# Altium PCB PCB1.PcbDoc
Units mm, origin at the board's own origin, x right, y up, seen from the top; angles counter-clockwise.
Board outline 219.44 x 29.08 mm, 7 copper layers (Top Layer, Signal Layer 2, Signal Layer 1, Signal Layer 3, Signal Layer 4, Internal Plane 1, Bottom Layer), stack 1.394 mm thick; 46 components, 7 nets, 276 pads, 11 vias.
Unrouted connection lines stored in the file: 6.
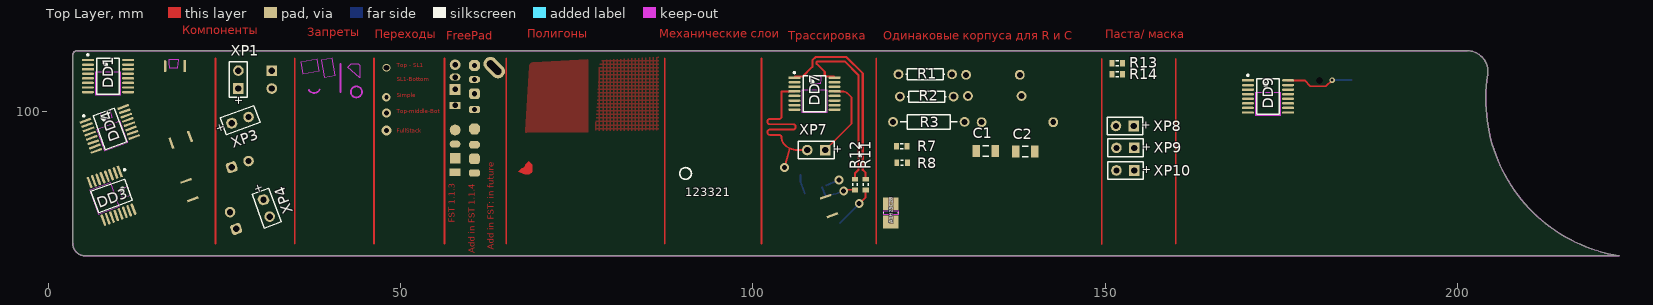
[diagram p0: Top Layer view]
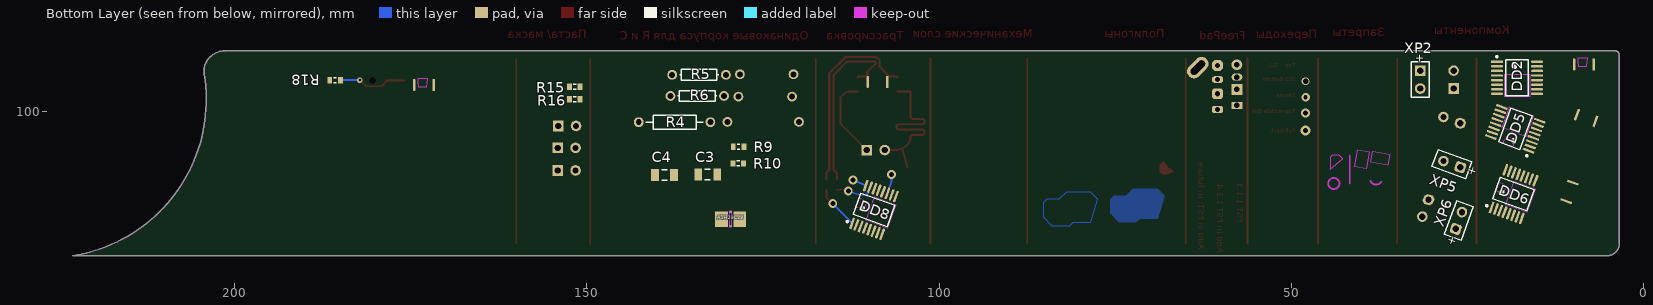
[diagram p1: Bottom Layer view, seen from below]
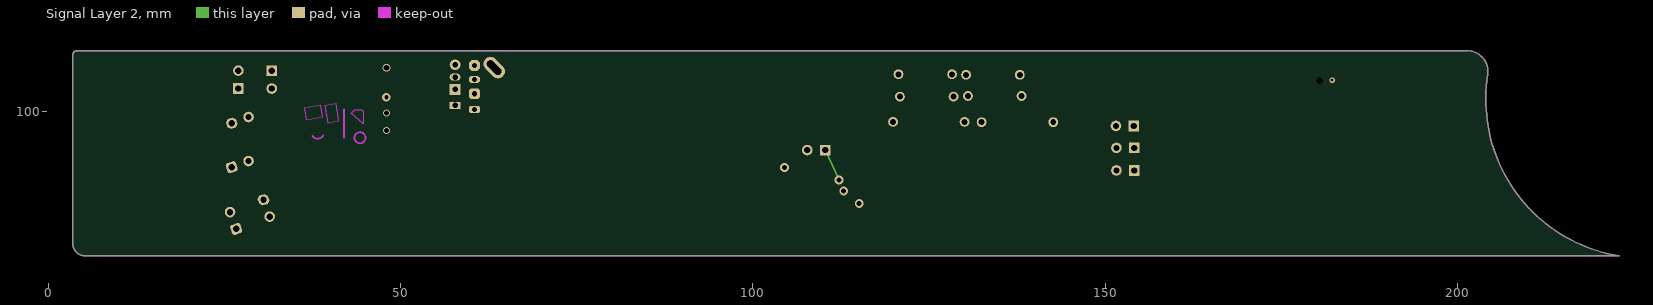
[diagram p2: Signal Layer 2]
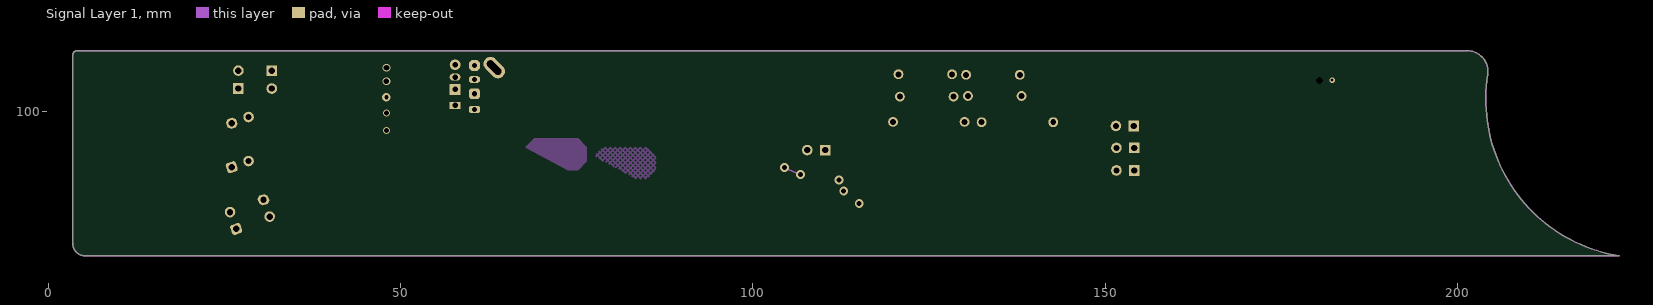
[diagram p3: Signal Layer 1]
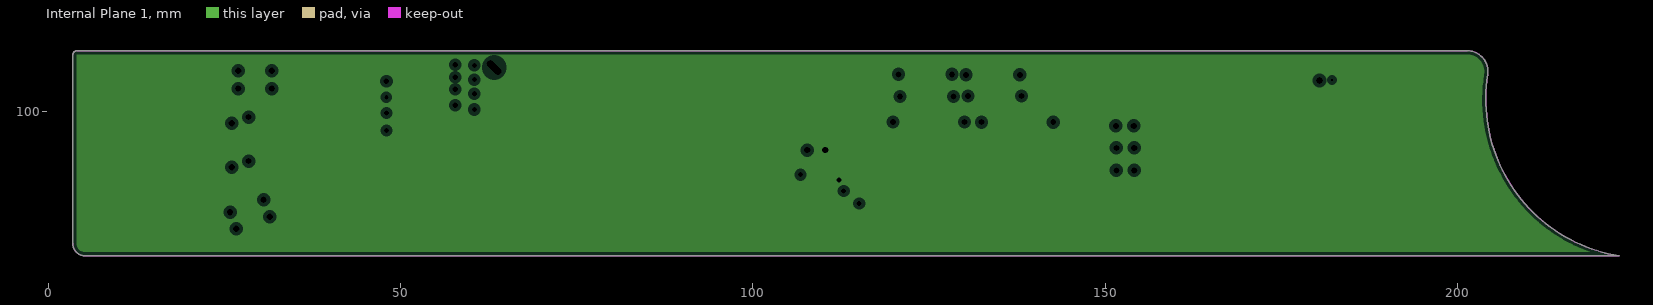
[diagram p4: Internal Plane 1, clearances drawn from the general rule]

## Layer stack, top to bottom
Top Solder: solder mask 0.0102, Solder Resist, Dk 3.5
Top Layer: signal copper 0.0356
Dielectric 1: core 0.254, FR-4 Pre, Dk 4.2
Signal Layer 2: signal copper 0.036
Dielectric 3: prepreg 0.127, FR-4, Dk 4.2
Signal Layer 1: signal copper 0.036
Dielectric 4: core 0.254, Dk 4.2
Signal Layer 3: signal copper 0.036
Dielectric 5: prepreg 0.127, Dk 4.2
Signal Layer 4: signal copper 0.036
Dielectric 6: core 0.254, Dk 4.2
Internal Plane 1: plane copper 0.036, net 321
Dielectric 2: prepreg 0.127, FR-4 Pre, Dk 4.2
Bottom Layer: signal copper 0.0356
Bottom Solder: solder mask 0.0102, Solder Resist, Dk 3.5

## Board outline
5.25,79.5 222.942,79.5 cw(c226.444,101.666) 204.281,105.183 ccw(c201.376,105.644) 201.376,108.585 4.085,108.585 ccw(c4.085,108) 3.5,108 3.5,81.25 ccw(c5.25,81.25)

## Design rules (kind name [scope] priority, off if disabled: settings)
BoardOutlineClearance [All] p1: gap=0.6 ignorepadtopadclearanceinfootprint=FALSE
Clearance Clearance_2 [InNet('Diff1_N') vs InNet('Diff1_P')] p1: gap=0.18 ignorepadtopadclearanceinfootprint=FALSE
Clearance Clearance_1 [InNet('123') vs InNet('321')] p2: gap=0.15 ignorepadtopadclearanceinfootprint=FALSE
Clearance [All] p3: gap=0.2 ignorepadtopadclearanceinfootprint=FALSE
DiffPairsRouting [All] p1: maxlimit=0.3 minlimit=0.2 mostfreqgap=0.3 toplayer_minwidth=0.2 toplayer_maxwidth=0.3 toplayer_prefwidth=0.3 midlayer1_minwidth=0.2 midlayer1_maxwidth=0.3 midlayer1_prefwidth=0.3 midlayer2_minwidth=0.2 midlayer2_maxwidth=0.3 midlayer2_prefwidth=0.3 midlayer3_minwidth=0.2 midlayer3_maxwidth=0.3 midlayer3_prefwidth=0.3 midlayer4_minwidth=0.2 midlayer4_maxwidth=0.3 midlayer4_prefwidth=0.3 bottomlayer_minwidth=0.2 bottomlayer_maxwidth=0.3 bottomlayer_prefwidth=0.3 maxuncoupledlength=12.7
Length [InxSignalClass('All xSignals')] p1: maxlimit=40 minlimit=30
PlaneClearance [All] p1: clearance=0.508
PlaneConnect [All] p1: planeconnectstyle=Relief reliefexpansion=0.508 reliefentries=4 reliefconductorwidth=0.254 reliefairgap=0.254
PolygonConnect [All] p1: connectstyle=Relief reliefconductorwidth=0.254 reliefentries=4 polygonreliefangle="90 Angle" airgapwidth=0.254
RoutingVias [All] p1: holewidth=0.4 width=0.8 viastyle="Through Hole" minholewidth=0.4 minwidth=0.8 maxholewidth=0.4 maxwidth=0.8
SolderMaskExpansion [All] p1: expansion=0.102 istentingtop=FALSE
Width Z0_50 [InNet('123')] p1: maxlimit=0.31 minlimit=0.31 preferedwidth=0.31 // Волновое сопротивление сигналов в TopoR.
Width [All] p2: maxlimit=0.5 minlimit=0.2 preferedwidth=0.254 toplayer_minwidth=0.254 toplayer_maxwidth=0.254 midlayer1_prefwidth=0.2 midlayer2_minwidth=0.254 midlayer2_maxwidth=0.254 midlayer3_minwidth=0.254 midlayer3_maxwidth=0.254 midlayer4_minwidth=0.254 midlayer4_maxwidth=0.254 bottomlayer_minwidth=0.254 bottomlayer_maxwidth=0.254 minimp=50.000000 maximp=50.000000 favimp=50.000000
27 further rules are at their usual default settings.

## Classes and differential pairs
component class retrete: DD2 DD6
differential pair class DD7-DD8: NewDifferentialPair1
net class &15: 123
net class dsa: 123 Diff1_N Diff1_P
differential pair R-DD8: +Diff1_P -Diff1_N
differential pair DD7-R: +Diff_P -Diff_N
differential pair NewDifferentialPair1: +123 -321

## Components (designator, comment, footprint, x,y, rotation, side; value= is the part's Value field where it differs from the comment)
A1H23C23 "ED32" K10-79_32x16x16_U14_RS 129.6,84.7 r180 bottom value=0,1u (schematic designator C23)
A1H25C28 "ED32" K10-79_32x16x16_U14_RS 119.6,85.6 r270 top value=0,1u (schematic designator C28)
C1 "Comment" C1206 133.05,94.375 r0 top locked
C2 "Comment" C1206 138.65,94.275 r0 top
C3 "Comment" C1206 132.85,91 r180 bottom
C4 "Comment" C1206 138.975,90.975 r180 bottom
DD1 "Comment" SOT403-1_N#1 8.5,105 r0 top
DD2 "Comment" SOT403-1_N#1 18,104.75 r180 bottom
DD3 "Comment" SOT403-1_N#2 9,88 r290 top
DD4 "Comment" SOT403-1_N#2 8.75,97.5 r20 top
DD5 "Comment" SOT403-1_N#2 18.25,97.5 r20 bottom
DD6 "Comment" SOT403-1_N#2 18.5,88.25 r110 bottom
DD7 "Comment" SOT403-1_N#2 108.75,102.5 r0 top
DD8 "Comment" SOT403-1_N#2 109.25,86 r110 bottom
DD9 "Comment" SOT403-1_N#1 173.1,102.1 r0 top
DD999 "Comment" SOT403-1_N#2 108.9,115.8 r0 top
R1 "Comment" AXIAL-0.3 124.475,105.25 r0 top
R2 "Comment" AXIAL-0.3 124.675,102.075 r0 top
R3 "Comment" AXIAL-0.4 124.975,98.5 r0 top
R4 "Comment" AXIAL-0.4 137.55,98.45 r180 bottom
R5 "Comment" AXIAL-0.3 134.075,105.175 r180 bottom
R6 "Comment" AXIAL-0.3 134.325,102.175 r180 bottom
R7 "Comment" J1-0603#1 121.125,95.05 r0 top
R8 "Comment" J1-0603#1 121.175,92.7 r0 top locked
R9 "Comment" J1-0603#1 128.475,94.95 r180 bottom
R10 "Comment" J1-0603#1 128.525,92.6 r180 bottom
R11 "Comment" J1-0603#1 116,89.6 r90 top
R12 "Comment" J1-0603#1 114.5,89.6 r90 top
R13 "Comment" J1-0603#1 151.7,106.8 r0 top
R14 "Comment" J1-0603#2 151.7,105.25 r0 top
R15 "Comment" J1-0603#1 151.7,103.5 r180 bottom
R16 "Comment" J1-0603#2 151.7,101.7 r180 bottom
R18 "Comment" J1-0603#1 185.725,104.425 r0 bottom
SB4 "Buton" TS-06 32.3,153.6 r270 top
SCR "BT152" TO220-RB-650 87.327,155.215 r0 top
TR "ER2815" ER2855 71.437,145.081 r0 top locked
XP1 "Comment" BAT-2#1 27,104.5 r90 top
XP2 "Comment" BAT-2#1 31.75,104.5 r270 bottom
XP3 "Comment" BAT-2#2 27.25,98.75 r20 top
XP4 "Comment" BAT-2#2 31,86.25 r290 top
XP5 "Comment" BAT-2#3 27.25,92.5 r20 bottom
XP6 "Comment" BAT-2#3 26.25,84.5 r110 bottom
XP7 "Comment" BAT-2#1 109,94.5 r180 top
XP8 "Comment" BAT-2#1 152.8,97.916 r180 top
XP9 "Comment" BAT-2#4 152.87,94.8 r180 top
XP10 "Comment" BAT-2#4 152.87,91.6 r180 top

## Footprints (in the part's own frame and the unit in brackets; to place one, negate y for a bottom-side part, rotate by r counter-clockwise, add the part's x,y. Pads: shape width x height; smd on the part's side, far side on the other; paste and mask are expansions set on the pad)
AXIAL-0.3 [mm] "Axial Device, Thru-Hole; 2 Leads; 0.3 in Pin Spacing"
  round 1.4 hole 0.85: 1(-3.81,0) 2(3.81,0)
  silkscreen extent -2.77,-0.76 2.77,0.76
AXIAL-0.4 [mm] "Axial Device, Thru-Hole; 2 Leads; 0.4 in Pin Spacing"
  round 1.4 hole 0.85: 1(-5.08,0) 2(5.08,0)
  silkscreen extent -4.06,-1.02 4.06,1.02
BAT-2#1 [mm] "Battery; 2 Leads"
  rect 1.5x1.5 hole 0.9: 1(-1.27,0)
  round 1.5 hole 0.9: 2(1.27,0)
  silkscreen extent -2.54,-1.27 2.54,1.27
BAT-2#2 [mm] "Battery; 2 Leads"
  oct 1.5x1.5 hole 0.9: 1(-1.27,0)
  round 1.5 hole 0.9: 2(1.27,0)
  silkscreen extent -2.54,-1.27 2.54,1.27
BAT-2#3 [mm] "Battery; 2 Leads"
  rrect50% 1.5x1.5 hole 0.9: 1(-1.27,0)
  round 1.5 hole 0.9: 2(1.27,0)
  silkscreen extent -2.54,-1.27 2.54,1.27
BAT-2#4 [mm] "Battery; 2 Leads"
  rect 1.5x1.5 hole 0.9 mask+0.102: 1(-1.27,0)
  round 1.5 hole 0.9 mask+0.102: 2(1.27,0)
  silkscreen extent -2.54,-1.27 2.54,1.27
C1206 [mm] "Chip Capacitor, Body 3.2x1.6mm, IPC High Density"
  rect 1.1x1.7 smd: 1(-1.35,0) 2(1.35,0)
  silkscreen extent -0.4,-0.75 0.4,0.75, body extent -1.7,-0.9 1.7,0.9, height 1.3
ER2855 [mm] "ER2855"
  round 2 hole 0.7: 1(-5.08,5.715) 4(-5.08,-5.715) 5(5.08,-5.715) 8(5.08,5.715)
  silkscreen extent -7.62,-7.2 7.62,7.2, body extent -7.5,-7 7.5,7, height 17.5
J1-0603#1 [mm] "Chip Resistor, Body 1.6x0.8mm, IPC High Density"
  rect 0.7x0.9 smd: 1(-0.75,0) 2(0.75,0)
  silkscreen extent -0.2,-0.35 0.2,0.35, body extent -0.85,-0.48 0.85,0.48, height 0.9
J1-0603#2 [mm] "Chip Resistor, Body 1.6x0.8mm, IPC High Density"
  rect 0.7x0.9 smd mask+0.102: 1(-0.75,0) 2(0.75,0)
  silkscreen extent -0.2,-0.35 0.2,0.35, body extent -0.85,-0.48 0.85,0.48, height 0.9
K10-79_32x16x16_U14_RS [mm]
  rect 1.8x2.2 smd: 1(-1.3,0) 2(1.3,0)
  Top Layer keep-out region: -0.2,-1.1 0.2,-1.1 0.2,1.1 -0.2,1.1
  silkscreen extent -0.1,-1 0.1,1, body extent -1.9,-1 1.9,1, height 1.6
SOT403-1_N#1 [mm] "TSOP, 16-Leads, Body 5x4.4mm, Pitch 0.65mm, IPC Medium Density"
  rect 1.7x0.35 smd: 1(-2.85,2.275)
  oct 1.7x0.35 smd: 2(-2.85,1.625)
  rrect50% 1.7x0.35 smd: 3(-2.85,0.975)
  oval 1.7x0.35 smd: 4(-2.85,0.325) 5(-2.85,-0.325) 6(-2.85,-0.975) 7(-2.85,-1.625) 8(-2.85,-2.275) 9(2.85,-2.275) 10(2.85,-1.625) 11(2.85,-0.975) 12(2.85,-0.325) 13(2.85,0.325) 14(2.85,0.975) 15(2.85,1.625) 16(2.85,2.275)
  rect 0.35x1.7 smd far side: 17(-1.397,1.651)
  oval 0.35x1.7 smd far side: 18(1.397,1.651)
  Top Layer keep-out region: -1.778,-2.667 1.778,-2.667 1.778,0.508 -1.778,0.508
  Bottom Layer keep-out region: -0.508,2.54 0.889,2.54 0.889,2.032 0.79,1.397 -0.409,1.397
  silkscreen extent -2.97,-2.55 1.6,3.12
SOT403-1_N#2 [mm] "TSOP, 16-Leads, Body 5x4.4mm, Pitch 0.65mm, IPC Medium Density"
  rect 1.7x0.35 smd: 1(-2.85,2.275)
  oct 1.7x0.35 smd: 2(-2.85,1.625)
  rrect50% 1.7x0.35 smd: 3(-2.85,0.975)
  oval 1.7x0.35 smd: 4(-2.85,0.325) 5(-2.85,-0.325) 6(-2.85,-0.975) 7(-2.85,-1.625) 8(-2.85,-2.275) 9(2.85,-2.275) 10(2.85,-1.625) 11(2.85,-0.975) 12(2.85,-0.325) 13(2.85,0.325) 14(2.85,0.975) 15(2.85,1.625) 16(2.85,2.275)
  rect 0.35x1.7 smd far side: 17(-1.397,1.651)
  oval 0.35x1.7 smd far side: 18(1.397,1.651)
  Top Layer keep-out region: -1.778,-2.667 1.778,-2.667 1.778,0.508 -1.778,0.508
  Top Layer keep-out region: -0.508,2.54 0.889,2.54 0.889,2.032 0.79,1.397 -0.409,1.397
  silkscreen extent -2.97,-2.55 1.6,3.12
TO220-RB-650 [mm]
  round 3.7 smd: 0(0,0)
  oval 2x2.5 hole 0.7: 1(-2.54,-16.51) 2(0,-16.51)
  oct 2x2.5 hole 0.7: 3(2.54,-16.51)
  silkscreen extent -2.7,-2.7 2.7,2.7, body extent -5.08,-17.97 5.08,2.58, height 1.72
TS-06 [mm]
  round 2 hole 0.9: 1(-2.25,3.25) 1(-2.25,-3.25) 2(2.25,3.25) 2(2.25,-3.25)
  silkscreen extent -3.05,-3.05 3.05,3.05, body extent -3,-3.3 3,3.3, height 3.95

## Part data
A1H23C23: ValueSch=0,1мк, 3D Ref=K10-79_32x16x16_U14_MS_ED32, 3D Ref 2=K10-79_32x16x16_U14_RS_ED32, ComponentLink1URL=http://pdm/nfile/ТУ%20на%20ЭРИ/АЖЯР.673511.004ТУ.pdf, ComponentLink3URL=P:\Exchange\Никитин\Datasheet\ENG_CD_787082_Y2.pdf, ID=32, IDC=ED32, mopGroupIndex=0, SafetyParamControlled=1, TimeMnogoUdar=1-5, TimeOdinUdar=0.1-2, TypeERI=Керамические, UdarMnogoPik=150, UdarOdinPik=1500, VibroLevel=40, Категория качества=ВП, Масса=0,15, Наименование=К10-79-25В-.....-Н30, Напряжение="25 В", Обозначение="К10-79-25 В-0,1 мкФ±20%-Н30", Производитель="ОАО \"НИИ \"ГИРИКОНД\"  г.Санкт-Петербург", Состояние проверки=3, ТУ1=АЖЯР.673511.004ТУ, Тип=К10-79, Тип в спецификации=Конденсатор
A1H25C28: "Конденсатор керамический постоянной емкости", ValueSch=0,1мк, 3D Ref=K10-79_32x16x16_U14_MS_ED32, 3D Ref 2=K10-79_32x16x16_U14_RS_ED32, ComponentLink1URL=http://pdm/nfile/ТУ%20на%20ЭРИ/АЖЯР.673511.004ТУ.pdf, ComponentLink3URL=P:\Exchange\Никитин\Datasheet\ENG_CD_787082_Y2.pdf, ID=32, IDC=ED32, mopGroupIndex=0, SafetyParamControlled=1, TimeMnogoUdar=1-5, TimeOdinUdar=0.1-2, TypeERI=Керамические, UdarMnogoPik=150, UdarOdinPik=1500, VibroLevel=40, Категория качества=ВП, Масса=0,15, Наименование=К10-79-25В-.....-Н30, Напряжение="25 В", Обозначение="К10-79-25 В-0,1 мкФ±20%-Н30", Производитель="ОАО \"НИИ \"ГИРИКОНД\"  г.Санкт-Петербург", Состояние проверки=3, ТУ1=АЖЯР.673511.004ТУ, Тип=К10-79, Тип в спецификации=Конденсатор
SCR: library part Tir, TargetPrice=2
TR: library part "SP-E13-6 096.904", "3W-15V-0.2A LKN501 2.8mH*", Price=1.8

## Free pads (board coordinates)
  oval 3.5x2 hole 1 slot 2.5 at 135 deg rot 135 paste+0: 0(63.3,106.2)
  rect 1.524x1 smd: 1(57.75,91.35)
  rect 1.5x1.5 smd: 1(57.75,93.35)
  oval 1.524x1 smd: 1(57.75,95.35)
  round 1.524 smd: 1(57.75,97.35)
  rect 1.524x1 hole 0.762: 1(57.75,100.85)
  rect 1.524x1.524 hole 0.762: 1(57.75,103.1)
  oval 1.524x1 hole 0.762: 1(57.75,104.85)
  round 1.524 hole 0.762: 1(57.75,106.6)
  rrect50% 1.5x1 smd: 1(60.5,91.25)
  rrect50% 1.5x1.5 smd: 1(60.5,93.25)
  oct 1.524x1 smd: 1(60.5,95.25)
  oct 1.524x1.524 smd: 1(60.5,97.5)
  rrect50% 1.524x1 hole 0.762: 1(60.5,100.25)
  rrect50% 1.524x1.524 hole 0.762: 1(60.5,102.5)
  oct 1.524x1 hole 0.762: 1(60.5,104.5)
  oct 1.524x1.524 hole 0.762: 1(60.5,106.5)
  round 0 hole 1 unplated: 2(180.4,104.375)

## Via types
v1: diameter 1.27/1.27/1.27/1.27/1.27/1.27 (per signal layer), hole 0.711, Top Layer to Bottom Layer, 3 vias
v2: diameter 0.8, hole 0.4, Top Layer to Bottom Layer, 1 vias
v3: diameter 1.27/1.27/1.27 (per signal layer), hole 0.711, Top Layer to Signal Layer 1, 1 vias
v4: diameter 1.27/1.27/1.27/1.27 (per signal layer), hole 0.711, Signal Layer 1 to Bottom Layer, 1 vias
v5: diameter 1.1/1.1/1.1/1.1 (per signal layer), hole 0.8, Signal Layer 1 to Bottom Layer, 1 vias
v6: diameter 1.4/1/1/1.5/1/1.4 (per signal layer), hole 0.7, Top Layer to Bottom Layer, 1 vias
v7: diameter 1.3/1/1/1/1/1.3 (per signal layer), hole 0.7, Top Layer to Bottom Layer, 1 vias
v8: diameter 1.2/1.2/1.2/1.2/1.2/1.2 (per signal layer), hole 0.6, Top Layer to Bottom Layer, 1 vias
v9: diameter 1.1/1.1/1.1 (per signal layer), hole 0.8, Top Layer to Signal Layer 1, 1 vias

## Nets (pads, with @x,y where several pads share a name; then routed paths per layer and width w, separated by ;. In a path a pad name is that pad's centre, name@x,y a point inside that pad or via, vN(x,y) a via of type N, cw(c..) or ccw(c..) an arc to the next point about the centre after c; other vN are vias at no path point)
123: A1H23C23.2 A1H25C28.1 DD7.4 DD8.11 SB4.1 XP7.2 | length 31.8
  Top Layer w0.254: v3(104.5,92) 105.242,94.732 ; DD7.4 104.075,102.825 104.075,99.3 104.075,99.254 cw(c103.736,99.254) 103.736,98.915 102.414,98.915 ccw(c102.414,98.576) 102.075,98.576 102.075,98.5 ccw(c102.414,98.5) 102.414,98.161 104.075,98.161 105.736,98.161 cw(c105.736,97.822) 106.075,97.822 106.075,97.746 cw(c105.736,97.746) 105.736,97.407 104.075,97.407 102.414,97.407 ccw(c102.414,97.068) 102.075,97.068 102.075,96.992 ccw(c102.414,96.992) 102.414,96.653 103.736,96.653 cw(c103.736,96.314) 104.075,96.314 104.075,96.276 ccw(c105.526,96.276) 104.5,95.25 104.506,95.244 ccw(c106.302,97.04) 105.242,94.732 ; XP7.2 106.302,94.5 cw(c106.302,97.04) 105.242,94.732
  Signal Layer 1 w0.254: v3(104.5,92) v4(106.75,91)
  Bottom Layer w0.254: v4(106.75,91) 106.75,90 DD8.11
321: A1H23C23.1 A1H25C28.2 DD7.13 DD8.16 XP7.1 | length 18.4
  Top Layer w0.254: XP7.1 114,98.23 114,102 113.5,102.5 ccw(c112.715,101.715) 112.715,102.825 DD7.13
  Signal Layer 2 w0.254: XP7.1 v1(112.25,90.25)
  Bottom Layer w0.254: DD8.16 v1(112.25,90.25)
DDNet: DD9.16 R18.1 | length 9.7
  Top Layer w0.254: DD9.16 178.292,104.375 179.119,103.548 181.323,103.548 v2(182.2,104.425)
  Bottom Layer w0.254: v2(182.2,104.425) R18.1
Diff1_N: DD8.15 R12.1 | length 5.5
  Top Layer w0.254: v1@113.05,88.85 R12.1
  Bottom Layer w0.254: DD8.15 110.3,88 111.8,88.3 v1(112.9,88.7)
Diff1_P: DD8.1 R11.1 | length 6.2
  Top Layer w0.254: v1(115.1,86.9) 116,87.8 R11.1
  Bottom Layer w0.254: DD8.1 v1(115.1,86.9)
Diff_N: DD7.16 R12.2 | length 25.6
  Top Layer w0.3: DD7.16 111.45,104.925 110.425,104.925 110.2,105.15 110.2,105.6 109.05,106.75 109.05,106.975 109.15,107.075 113.05,107.075 115,105.125 115,93.05 115,91.7 114.5,91.2 R12.2
Diff_P: DD7.1 R11.2 | length 27.6
  Top Layer w0.3: DD7.1 106.05,104.925 107.075,104.925 108.45,106.3 108.45,107.223 108.901,107.675 113.299,107.675 115.6,105.374 115.6,93 115.6,91.7 116,91.3 R11.2
pads on no net: C1.1 C1.2 C2.1 C2.2 C3.1 C3.2 C4.1 C4.2 DD1.1 DD1.2 DD1.3 DD1.4 DD1.5 DD1.6 DD1.7 DD1.8 DD1.9 DD1.10 DD1.11 DD1.12 DD1.13 DD1.14 DD1.15 DD1.16 DD1.17 DD1.18 DD2.1 DD2.2 DD2.3 DD2.4 DD2.5 DD2.6 DD2.7 DD2.8 DD2.9 DD2.10 DD2.11 DD2.12 DD2.13 DD2.14 DD2.15 DD2.16 DD2.17 DD2.18 DD3.1 DD3.2 DD3.3 DD3.4 DD3.5 DD3.6 DD3.7 DD3.8 DD3.9 DD3.10 DD3.11 DD3.12 DD3.13 DD3.14 DD3.15 DD3.16 DD3.17 DD3.18 DD4.1 DD4.2 DD4.3 DD4.4 DD4.5 DD4.6 DD4.7 DD4.8 DD4.9 DD4.10 DD4.11 DD4.12 DD4.13 DD4.14 DD4.15 DD4.16 DD4.17 DD4.18 DD5.1 DD5.2 DD5.3 DD5.4 DD5.5 DD5.6 DD5.7 DD5.8 DD5.9 DD5.10 DD5.11 DD5.12 DD5.13 DD5.14 DD5.15 DD5.16 DD5.17 DD5.18 DD6.1 DD6.2 DD6.3 DD6.4 DD6.5 DD6.6 DD6.7 DD6.8 DD6.9 DD6.10 DD6.11 DD6.12 DD6.13 DD6.14 DD6.15 DD6.16 DD6.17 DD6.18 DD7.2 DD7.3 DD7.5 DD7.6 DD7.7 DD7.8 DD7.9 DD7.10 DD7.11 DD7.12 DD7.14 DD7.15 DD7.17 DD7.18 DD8.2 DD8.3 DD8.4 DD8.5 DD8.6 DD8.7 DD8.8 DD8.9 DD8.10 DD8.12 DD8.13 DD8.14 DD8.17 DD8.18 DD9.1 DD9.2 DD9.3 DD9.4 DD9.5 DD9.6 DD9.7 DD9.8 DD9.9 DD9.10 DD9.11 DD9.12 DD9.13 DD9.14 DD9.15 DD9.17 DD9.18 DD999.1 DD999.2 DD999.3 DD999.4 DD999.5 DD999.6 DD999.7 DD999.8 DD999.9 DD999.10 DD999.11 DD999.12 DD999.13 DD999.14 DD999.15 DD999.16 DD999.17 DD999.18 R1.1 R1.2 R2.1 R2.2 R3.1 R3.2 R4.1 R4.2 R5.1 R5.2 R6.1 R6.2 R7.1 R7.2 R8.1 R8.2 R9.1 R9.2 R10.1 R10.2 R13.1 R13.2 R14.1 R14.2 R15.1 R15.2 R16.1 R16.2 R18.2 SB4.2 SCR.0 SCR.1 SCR.2 SCR.3 TR.1 TR.4 TR.5 TR.8 XP1.1 XP1.2 XP2.1 XP2.2 XP3.1 XP3.2 XP4.1 XP4.2 XP5.1 XP5.2 XP6.1 XP6.2 XP8.1 XP8.2 XP9.1 XP9.2 XP10.1 XP10.2
copper on no net: | length 403.6
  Top Layer w0.127: 127.434,179.553 150.802,179.553 150.802,181.966 127.434,181.966 127.434,179.553
  Top Layer w0.2: 101.347,125.877 101.347,126.277 ; 101.347,126.277 94.947,126.277 94.947,132.677 101.347,132.677 101.347,126.277
  Top Layer w0.254: 23.75,81.25 23.75,107.5 ; 35,81.25 35,107.5 ; 46.25,81.25 46.25,107.5 ; 56.25,81.25 56.25,107.5 ; 65,81.25 65,107.5 ; 87.5,81.25 87.5,107.5 ; 101.25,81.25 101.25,107.5 ; 102.3,161.2 114.3,161.2 ; 117.5,81.25 117.5,107.5 ; 149.5,81.15 149.5,107.4 ; 160,81.198 160,107.448
  Bottom Layer w0.127: 127.434,177.14 150.802,177.14 150.802,179.553 127.434,179.553 127.434,177.14
  other v5: 48,104.25
  other v6: 48,97.25
  other v7: 48,99.75
  other v8: 48,102
  other v9: 48.01,106.18

## Polygon pours and split planes (outlines as drawn)
no net on Mechanical 1 "Signal Layer 1-No Net" (solid): 94.431,99.681 94.75,100 94.75,101 97.25,101 97.75,100.5 97.75,99.5 97.25,99.5 96.25,98.5 94.695,98.811 cw(c94.796,99.317)
no net on Top Layer "Signal Layer 1-No Net" (hatched 90Degree grid 0.508 track 0.203, pour order 10): 78.831,107.283 86.625,107.703 86.625,97.287 77.916,97.221 cw(c77.916,97.475) 77.662,97.475 78.262,106.72 cw(c78.863,106.681)
321 on Top Layer "Signal Layer 1-No Net" (solid, pour order 2): 68.869,106.985 76.663,107.405 76.663,96.989 67.954,96.923 cw(c67.954,97.177) 67.7,97.177 68.3,106.423 cw(c68.901,106.384)
no net on Signal Layer 1 "TL-No Net" (hatched 45Degree grid 0.508 track 0.203, pour order 12): 77.453,93.65 78.703,94.9 84.953,94.9 86.203,93.65 86.203,91.65 84.953,90.4 83.453,90.4
123 on Signal Layer 1 "TL-No Net" (solid, pour order 4): 67.703,94.9 68.953,96.15 75.203,96.15 76.453,94.9 76.453,92.9 75.203,91.65 73.703,91.65
no net on Bottom Layer "TL-No Net" (none, pour order 14): 77.5,87.5 78.5,88.5 82,88.5 83,87.5 84.75,87.5 85.25,87 85.25,85 84,83.75 81.5,83.75 81,84.25 78.5,84.25
no net on Bottom Layer "TL-No Net" (solid, pour order 8): 68,88 69,89 72.5,89 73.5,88 75.25,88 75.75,87.5 75.75,85.5 74.5,84.25 72,84.25 71.5,84.75 69,84.75
321 on Internal Plane 1 (split plane): 201.588,108.067 201.798,108.04 202.006,107.994 202.208,107.93 202.404,107.849 202.592,107.751 202.771,107.637 202.94,107.507 203.096,107.364 203.24,107.208 203.369,107.039 203.483,106.86 203.581,106.672 203.662,106.476 203.726,106.274 203.772,106.066 203.799,105.856 203.809,105.644 203.799,105.432 203.777,105.263 203.778,105.263 203.777,105.25 203.735,104.992 203.648,104.33 203.58,103.666 203.532,103 203.503,102.333 203.493,101.666 203.503,100.998 203.532,100.331 203.58,99.666 203.648,99.001 203.735,98.34 203.842,97.68 203.967,97.025 204.111,96.373 204.275,95.726 204.457,95.083 204.658,94.447 204.877,93.816 205.114,93.192 205.37,92.575 205.643,91.966 205.934,91.365 206.242,90.773 206.568,90.19 206.91,89.617 207.269,89.054 207.644,88.502 208.034,87.96 208.441,87.431 208.862,86.913 209.299,86.408 209.75,85.916 210.215,85.437 210.694,84.972 211.186,84.521 211.691,84.084 212.209,83.663 212.739,83.256 213.28,82.865 213.832,82.49 214.395,82.132 214.968,81.79 215.551,81.464 216.144,81.156 216.744,80.865 217.354,80.592 217.97,80.336 218.594,80.099 218.848,80.01 5.25,80.01 5.238,80.009 5.111,80.016 4.974,80.04 4.84,80.078 4.711,80.132 4.59,80.199 4.476,80.279 4.372,80.372 4.279,80.476 4.199,80.59 4.132,80.711 4.078,80.84 4.04,80.974 4.016,81.111 4.009,81.238 4.01,81.25 4.01,108 4.01,108.005 4.015,108.029 4.031,108.054 4.056,108.07 4.08,108.075 4.085,108.075 201.376,108.074 201.392,108.076

## Keep-outs
Top Layer:
  circle w0.254: c43.75,102.75 r0.791
  region: 38.75,107.25 39.172,104.858 40.775,105.141 40.353,107.533
  region: 38.217,107.353 35.826,106.931 36.108,105.328 38.5,105.75
  region: 42.5,106.25 43,106.75 44,106.75 44.25,106.5 44.25,104.75
  lines w0.254: 37,103 ccw(c37.75,103.5) 38.556,103.097 ; 41.5,102.75 41.5,106.75
Signal Layer 2:
  circle w0.254: c44.25,96.25 r0.791
  region: 39.25,100.75 39.672,98.358 41.275,98.641 40.853,101.033
  region: 38.717,100.853 36.326,100.431 36.608,98.828 39,99.25
  region: 43,99.75 43.5,100.25 44.5,100.25 44.75,100 44.75,98.25
  lines w0.254: 37.5,96.5 ccw(c38.25,97) 39.056,96.597 ; 42,96.25 42,100.25
Bottom Layer:
  circle w0.254: c44,89.75 r0.791
  region: 39,94.25 39.422,91.858 41.025,92.141 40.603,94.533
  region: 38.467,94.353 36.076,93.931 36.358,92.328 38.75,92.75
  region: 42.75,93.25 43.25,93.75 44.25,93.75 44.5,93.5 44.5,91.75
  lines w0.254: 37.25,90 ccw(c38,90.5) 38.806,90.097 ; 41.75,89.75 41.75,93.75
Keep-Out Layer:
  rectangle: 127.434,141.174 132.26,143.587
  lines w0.1: 3.5,81.25 ccw(c5.25,81.25) 5.25,79.5 222.942,79.5 cw(c226.444,101.666) 204.281,105.183 ccw(c201.376,105.644) 201.376,108.585 4.085,108.585 ccw(c4.085,108) 3.5,108 3.5,81.25
  lines w0.127: 127.434,141.174 150.802,141.174 150.802,143.587 127.434,143.587 127.434,141.174
  text "ROUTING KEEPOUT LAYER" at 134.038,141.86 h0.89

## Other copper
Top Layer:
  rectangle: 89.247,126.377 94.947,129.277
  rectangle: 94.947,125.777 101.347,126.277
  rectangle: 93.547,125.777 94.947,132.777
  region: 62.422,129.277 62.422,126.252 69.247,126.252 69.247,129.277
  region: 65.047,132.552 62.272,132.552 62.272,125.777 65.047,125.777
  region: 94.647,132.327 94.647,132.777 62.272,132.777 62.272,132.327
  region: 95.047,125.777 95.047,126.602 62.272,126.602 62.272,125.777
  region: 62.172,125.777 62.172,132.777 61.672,132.777 61.672,125.777
  region: 59.847,125.777 59.847,132.777 59.722,132.777 59.722,125.777
  region: 60.347,125.777 60.347,132.777 60.147,132.777 60.147,125.777
  region: 60.922,125.777 60.922,132.777 60.622,132.777 60.622,125.777
  region: 61.522,125.777 61.522,132.777 61.147,132.777 61.147,125.777
  region: 59.372,125.777 59.372,132.777 59.297,132.777 59.297,125.777
  rectangle: 127.434,179.553 132.26,181.966
  region net 321: 68.614,91.302 68.71,91.398 68.71,92.398 68.21,92.898 67.71,92.398 cw(c67.21,92.398) 67.21,91.898 66.71,91.398 67.667,91.078 ccw(c67.96,91.957)
  text "TOP LAYER" at 134.038,180.239 h1.02
  text "Шрифт калибри:" at 102.2,163.6 h2
  text "MOTO35@ABV.BG" at 101.8,161.8 h1.9
  text "Два первых контакта:" at 28.6,158.9 h2
  text "Altera®  Cyclone™ II" at 65.151,129.877 h3.2
  text "EP2C35F672C8" at 69.551,126.677 h3
  text "Разобраться с цепями у дубликатов" at 103.7,122.85 h2
  text "дубликат" at 103.7,120.05 h2
  text "Компоненты" at 19,110.5 h2
  text "Запреты" at 36.75,110.25 h2
  text "Полигоны" at 68,110 h2
  text "Механические слои" at 86.75,110 h2
  text "Переходы" at 46.35,109.95 h2
  text "Паста/ маска" at 149.975,109.95 h2
  text "FreePad" at 56.5,109.75 h2
  text "Трассировка" at 105,109.75 h2
  text "Одинаковые корпуса для R и C" at 118.475,109.75 h2
  text "Top - SL1" at 49.5,106 h1
  text "SL1-Bottom" at 49.49,104.07 h1
  text "Simple" at 49.5,101.75 h1
  text "Top-middle-Bot" at 49.5,99.5 h1
  text "FullStack" at 49.5,96.75 h1
  text "FST 1.1.3" at 58.075,84.175 h1.5 r90
  text "Add in FST: in future" at 63.6,80.375 h1.5 r90
  text "Add in FST 1.1.4" at 60.9,79.875 h1.5 r90
Bottom Layer:
  rectangle: 127.434,177.14 132.26,179.553
  text "BOTTOM LAYER" at 134.038,177.826 h1.02
Multi-Layer:
  rectangle: 127.434,156.16 132.26,158.573
  lines w0.127: 127.434,156.16 150.802,156.16 150.802,158.573 127.434,158.573 127.434,156.16
  text "MULTILAYER" at 134.038,156.846 h1.02

## Silkscreen, mask and mechanical layers (free items; w line width, h text height)
Top Overlay:
  circle w0.254: c90.45,91.175 r0.828
  rectangle: 88.347,115.777 94.047,118.677
  rectangle: 94.047,115.177 100.447,115.677
  rectangle: 92.647,115.177 94.047,122.177
  region: 61.522,118.677 61.522,115.652 68.347,115.652 68.347,118.677
  region: 64.147,121.952 61.372,121.952 61.372,115.177 64.147,115.177
  region: 93.747,121.727 93.747,122.177 61.372,122.177 61.372,121.727
  region: 94.147,115.177 94.147,116.002 61.372,116.002 61.372,115.177
  region: 61.272,115.177 61.272,122.177 60.772,122.177 60.772,115.177
  region: 58.947,115.177 58.947,122.177 58.822,122.177 58.822,115.177
  region: 59.447,115.177 59.447,122.177 59.247,122.177 59.247,115.177
  region: 60.022,115.177 60.022,122.177 59.722,122.177 59.722,115.177
  region: 60.622,115.177 60.622,122.177 60.247,122.177 60.247,115.177
  region: 58.472,115.177 58.472,122.177 58.397,122.177 58.397,115.177
  rectangle: 127.434,185.548 132.26,187.961
  lines w0.127: 127.434,185.548 127.434,187.961 150.802,187.961 150.802,185.548 127.434,185.548
  lines w0.2: 100.447,115.277 100.447,115.677 ; 100.447,115.677 94.047,115.677 94.047,122.077 100.447,122.077 100.447,115.677
  text "TOP OVERLAY" at 134.038,186.234 h1.02
  text "Altera®  Cyclone™ II" at 64.251,119.277 h3.2
  text "EP2C35F672C8" at 68.651,116.077 h3
  text "123321" at 90.4,87.55 h2
Bottom Overlay:
  rectangle: 127.434,171.146 132.26,173.559
  lines w0.127: 127.434,171.146 127.434,173.559 150.802,173.559 150.802,171.146 127.434,171.146
  text "BOTTOM LEGEND" at 134.038,171.832 h1.02
Top Paste:
  rectangle: 127.434,188.545 132.26,190.958
  lines w0.127: 127.434,188.545 150.802,188.545 150.802,190.958 127.434,190.958 127.434,188.545
  text "TOP PASTE" at 134.038,189.231 h1.02
Bottom Paste:
  rectangle: 127.434,168.149 132.26,170.562
  lines w0.127: 127.434,168.149 150.802,168.149 150.802,170.562 127.434,170.562 127.434,168.149
  text "BOTTOM PASTE" at 134.038,168.835 h1.02
Top Solder:
  rectangle: 150.75,87.8 152.9,89.25
  rectangle: 127.434,182.551 132.26,184.964
  region: 152.314,85.555 152.41,85.65 152.41,86.65 151.91,87.15 151.41,86.65 cw(c150.91,86.65) 150.91,86.15 150.41,85.65 151.367,85.331 ccw(c151.66,86.209)
  lines w0.127: 127.434,182.551 127.434,184.964 150.802,184.964 150.802,182.551 127.434,182.551
  text "TOP SOLDER MASK" at 134.038,183.236 h1.02
Bottom Solder:
  rectangle: 127.434,174.143 132.26,176.556
  lines w0.127: 127.434,174.143 150.802,174.143 150.802,176.556 127.434,176.556 127.434,174.143
  text "BOTTOM SOLDER MASK" at 134.038,174.829 h1.02
Drill Guide:
  rectangle: 127.434,165.152 132.26,167.565
  lines w0.127: 127.434,165.152 127.434,167.565 150.802,167.565 150.802,165.152 127.434,165.152
  text "DRILL GUIDE (SLOTS)" at 134.038,165.837 h1.02
Mechanical 1:
  rectangle: 88.75,103.75 93.75,106.75
  rectangle: 127.434,159.157 132.26,161.57
  region: 91.914,100.002 92.01,100.098 92.01,101.098 91.51,101.598 91.01,101.098 cw(c90.51,101.098) 90.51,100.598 90.01,100.098 90.967,99.778 ccw(c91.26,100.657)
  lines w0.1: 3,79.5 4,79.5 ; 3.5,79 3.5,80
  lines w0.127: 127.434,159.157 127.434,161.57 150.802,161.57 150.802,159.157 127.434,159.157
  lines w0.2: 97.515,106.322 ccw(c97.768,104.828) 98.87,103.79
  lines w0.254: 90.88,94.025 90.88,97.454
  text "BOARD OUTLINE" at 134.038,159.843 h1.02
  text "123321" at 94,95.25 h1.52
Mechanical 3:
  rectangle: 127.434,153.163 132.26,155.576
  lines w0.127: 127.434,153.163 150.802,153.163 150.802,155.576 127.434,155.576 127.434,153.163
  lines w0.254: 129.72,193.244 149.278,193.244 ; 124.894,138.964 124.894,198.832 153.596,198.832 153.596,138.964 124.894,138.964
  text "LAYER USAGE" at 129.72,193.955 h2.03
  text "TECHNICAL DATA" at 134.038,153.849 h1.02
Mechanical 6:
  rectangle: 127.434,150.166 132.26,152.579
  lines w0.127: 127.434,150.166 150.802,150.166 150.802,152.579 127.434,152.579 127.434,150.166
  text "Трансляция символов" at 101.9,180.9 h1.75
  text "&- & a m p; & &" at 102.1,178.2 h2
  text "\" - & q u o t;" at 102.7,175.6 h2
  text "MANUFACTURE DATA" at 134.038,150.851 h1.02
Mechanical 7:
  rectangle: 127.434,147.168 132.26,149.581
  text "IDENTIFICATION DATA" at 134.038,147.854 h1.02
Mechanical 15:
  rectangle: 127.434,144.171 132.26,146.584
  lines w0.127: 127.434,144.171 150.802,144.171 150.802,146.584 127.434,146.584 127.434,144.171
  text "DIMENSIONS" at 134.038,144.857 h1.02
Drill Drawing:
  rectangle: 127.434,162.154 132.26,164.567
  lines w0.127: 127.434,162.154 150.802,162.154 150.802,164.567 127.434,164.567 127.434,162.154
  text "DRILL DRAWING" at 134.038,162.84 h1.02
Mechanical 31:
  lines w0.254: 89.6,84.1 91.7,82 94.3,82 95.8,83.5 97.6,83.5 95.4,85.7 92.8,85.7 91.2,84.1 89.6,84.1
Mechanical 50:
  rectangle: 127.234,145.766 132.06,148.179
  lines w0.127: 127.234,145.766 127.234,148.179 150.602,148.179 150.602,145.766 127.234,145.766
  text "M50" at 133.838,146.451 h1.02

## Text inside footprints (layer, text, board x,y; h text height)
XP1: Top Overlay "+" at 27.577,100.83 h1.15 r90
XP2: Bottom Overlay "+" at 32.327,108.17 h1.15 r90
XP3: Top Overlay "+" at 23.999,96.953 h1.15 r20
XP4: Top Overlay "+" at 29.203,89.501 h1.15 r290
XP5: Bottom Overlay "+" at 23.604,91.787 h1.15 r200
XP6: Bottom Overlay "+" at 26.963,80.854 h1.15 r290
XP7: Top Overlay "+" at 112.67,95.077 h1.15 r180
XP8: Top Overlay "+" at 156.47,98.493 h1.15 r180
XP9: Top Overlay "+" at 156.54,95.377 h1.15 r180
XP10: Top Overlay "+" at 156.54,92.177 h1.15 r180